# EAGLE board DigitalSandbox_Panel_v11a (EAGLE 7.3.0), part 1 of 2
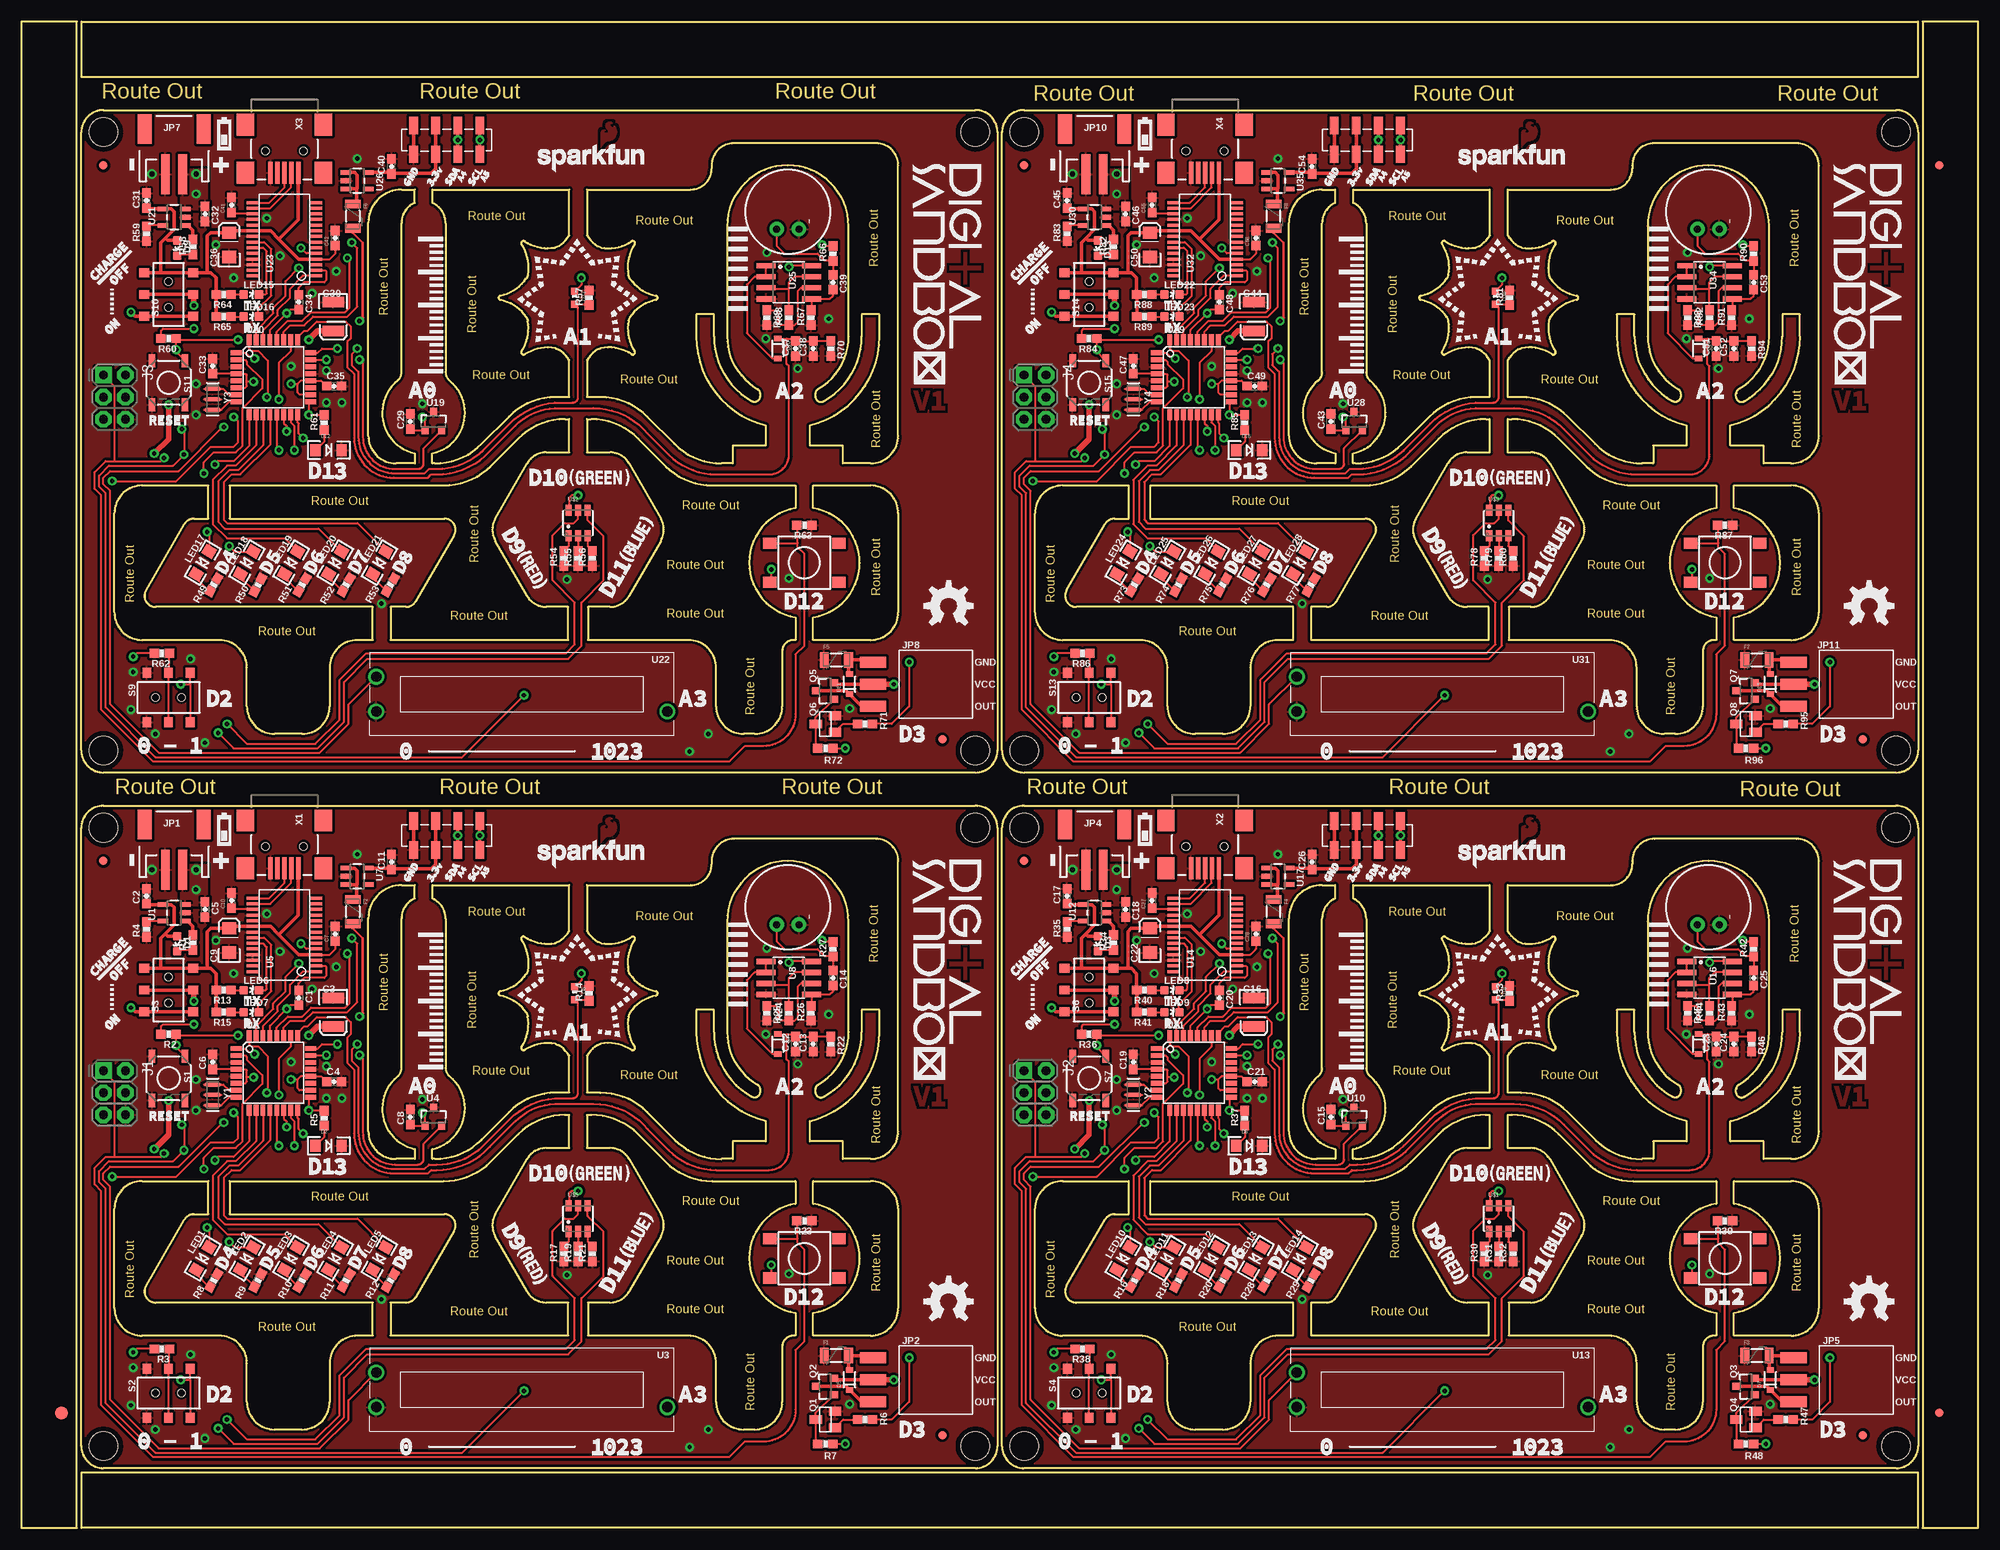
[diagram p0: board, top side]
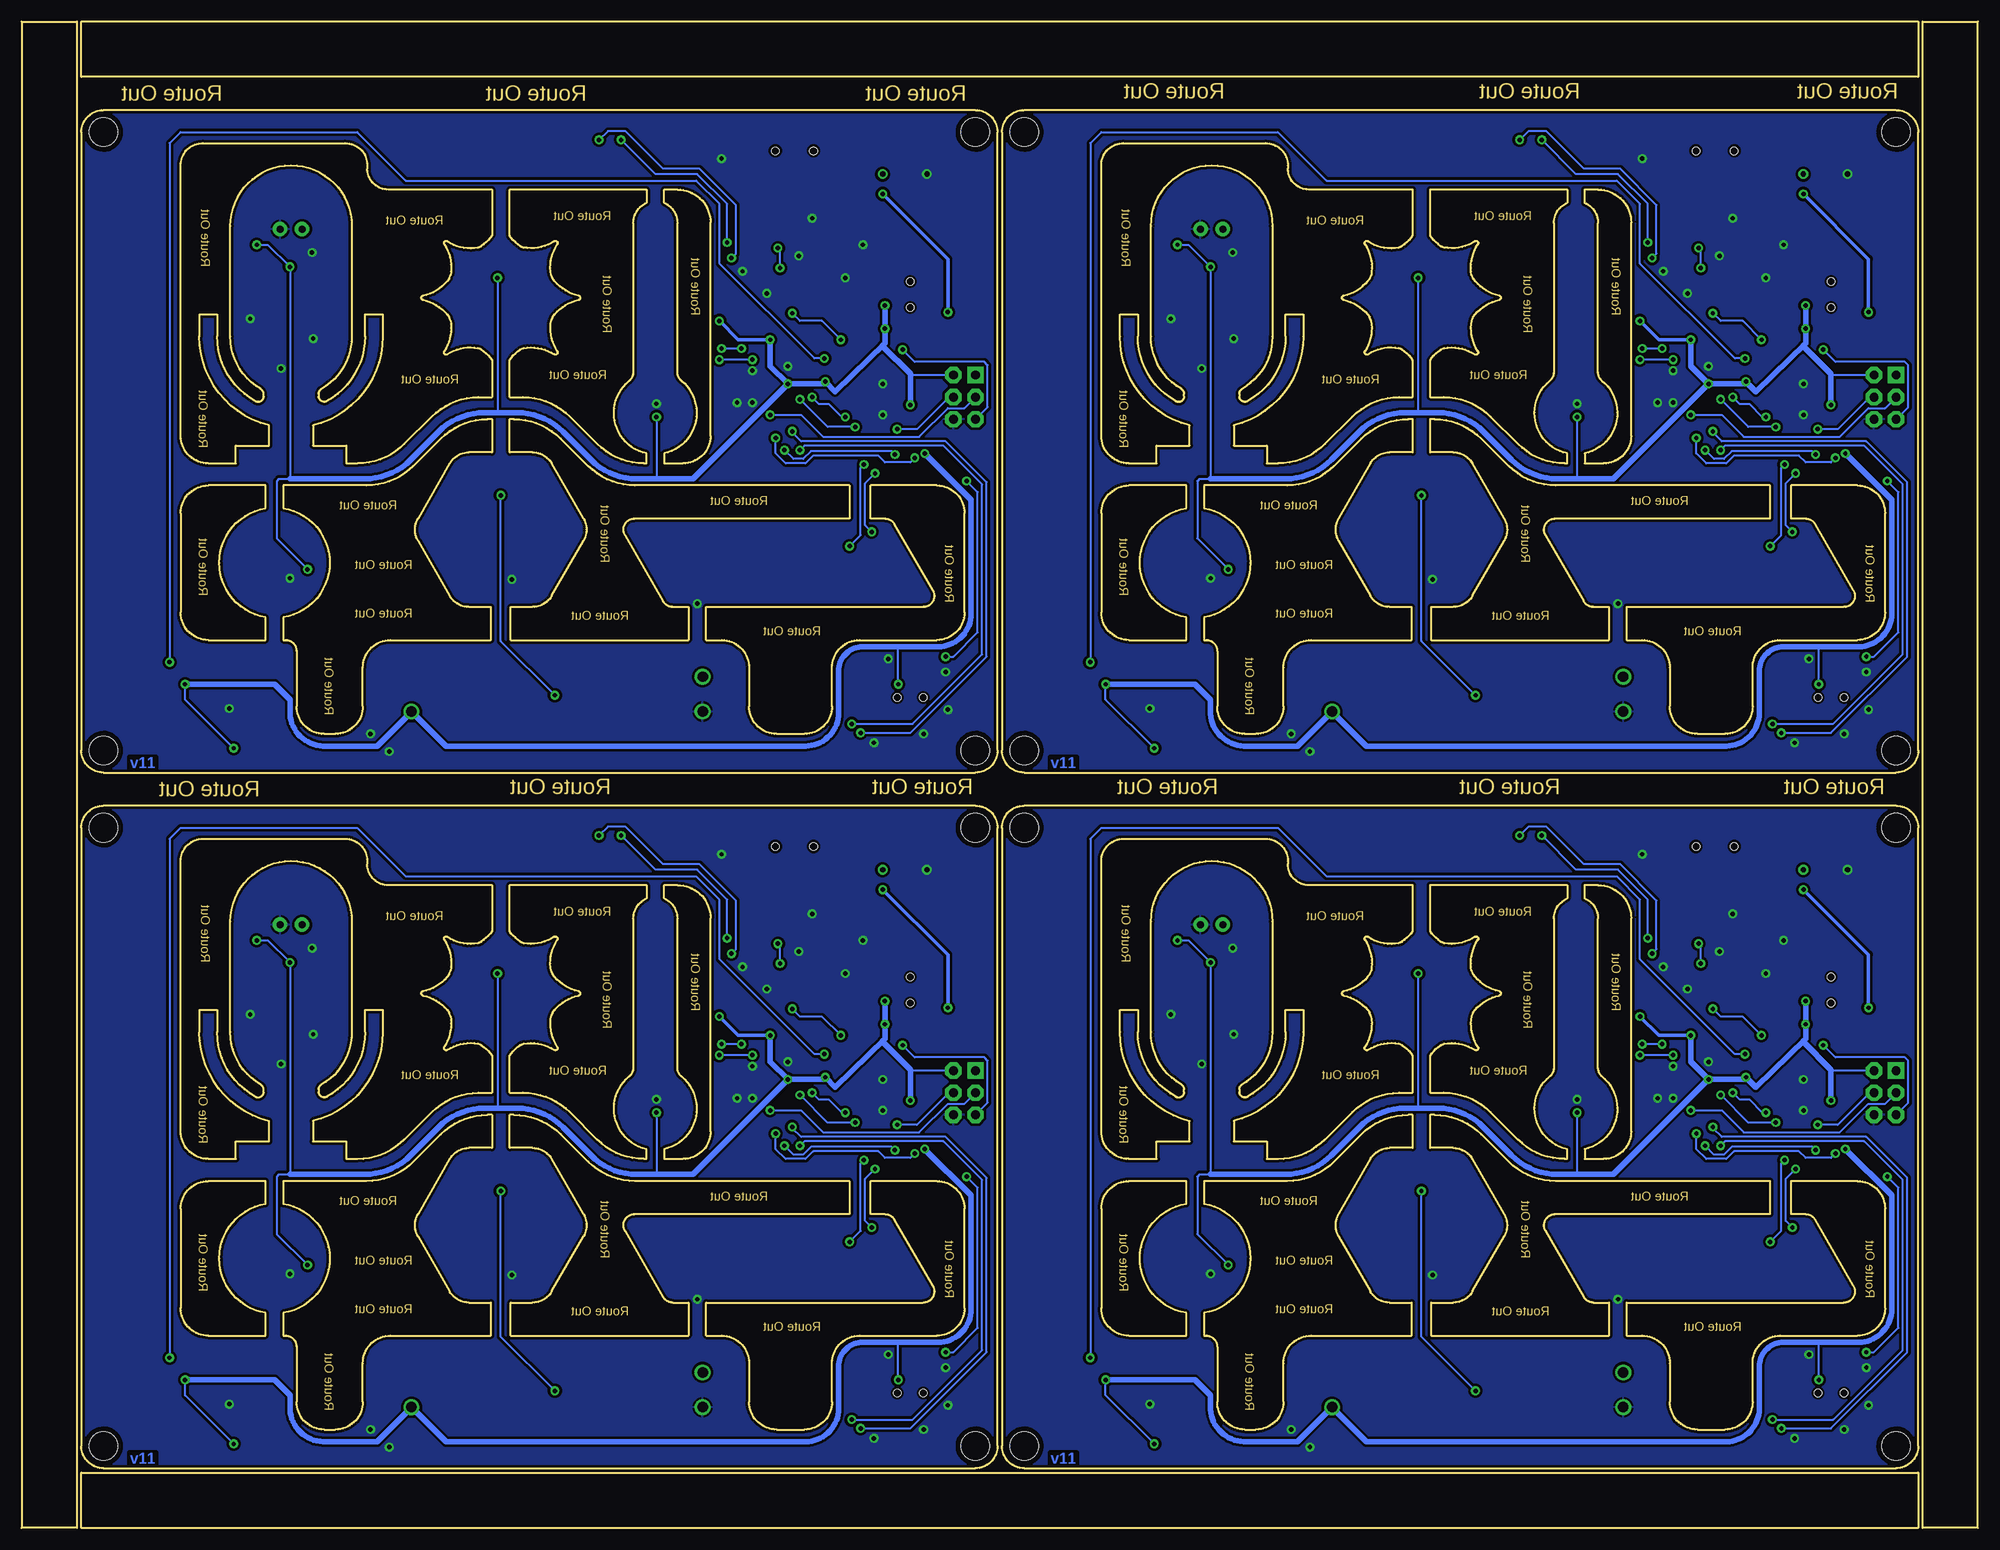
[diagram p1: board, bottom side, seen from below]

Size 225.04 x 173.23 mm. Coordinates in mm from the lower left corner, seen from the top.
Outline: 744 segments
Copper layers (1*16): Top 0.035mm / dielectric 1.5mm / Bottom 0.035mm
Design rules "SparkFun-2-layer": minimum track width 7mil, minimum drill 15mil, track to track 8mil, track to pad 8mil, pad to pad 8mil, via to via 8mil, smd to smd 8mil, copper to edge 8mil, drill to drill 8mil, minimum pad ring 12mil, minimum via ring 10mil, stop-mask expansion 4mil, vias tented up to drill 20mil, thermal gap 10mil
Net classes: 0 default: width 0.203 mm; 1 power: width 0.254 mm

## Footprints (pad centres in the part's own frame; a part is rotated, then mirrored left to right if it is on the bottom)
0603-CAP = smd 1.1 x 1: 1 -0.85,0; 2 0.85,0
EIA3528 = smd 1.2 x 2.5: A 1.65,0; C -1.65,0
EIA3216 = smd 1.4 x 1.6: A 1.4,0; C -1.4,0
LED-0603 = smd 1 x 1: A 0,-0.877; C 0,0.877
LED-1206 = smd 1.2 x 1.4: A -1.5,0; C 1.5,0
SOD-323 = smd 0.63 x 0.83: A 1.15,0; C -1.15,0
FIDUCIAL-1.5X3 = smd 1.5 x 1.5: 1 0,0
FIDUCIAL-1X2 = smd 1 x 1: 1 0,0
PTC-1206 = smd 1 x 1.8: 1 -1.4,0; 2 1.4,0
2X3-NS = drill 1.016 pad 1.88 square: 1 -2.54,-1.27 | drill 1.016 pad 1.88 octagon: 2 -2.54,1.27; 3 0,-1.27; 4 0,1.27; 5 2.54,-1.27; 6 2.54,1.27
JST-2-SMD = smd 1 x 4.6: 1 -1,-3.7; 2 1,-3.7 | smd 1.6 x 3.4: NC1 -3.4,1.5; NC2 3.4,1.5
1X03_SMD_RA_FEMALE = smd 1.25 x 3: 1 -2.54,7.225; 2 0,7.225; 3 2.54,7.225
1X04_SMD_STRAIGHT_COMBO = smd 1 x 2: 1 0,-1.65; 1-2 0,1.65; 2 2.54,1.65; 2-2 2.54,-1.65; 3 5.08,-1.65; 3-2 5.08,1.65; 4 7.62,1.65; 4-2 7.62,-1.65
SOT23 = smd 1 x 1.4: 1 -0.95,-1.1; 2 0.95,-1.1; 3 0,1.1
SOT23-3 = smd 0.8 x 0.9: 1 -0.95,-1; 2 0.95,-1; 3 0,1.1
0603-RES = smd 1.1 x 1: 1 -0.85,0; 2 0.85,0
TACTILE_SWITCH_SMD = smd 1.524 x 0.762: 1 -2.54,1.905; 2 2.54,1.905; 3 -2.54,-1.905; 4 2.54,-1.905
AYZ0202 = smd 1 x 1.15: 1 -2.5,2.825; 2 0,2.825; 3 2.5,2.825; 4 -2.5,-2.825; 5 0,-2.825; 6 2.5,-2.825 | hole 0.85: 1.5,0; -1.5,0
TACTILE_SWITCH_TALL = smd 1.55 x 1.3: A1 -3.975,-2.25; A2 3.975,-2.25; B1 -3.975,2.25; B2 3.975,2.25
STAND-OFF = hole 3.302: 0,0
SOT23-5 = smd 0.55 x 1.2: 1 -0.95,-1.3; 2 0,-1.3; 3 0.95,-1.3; 4 0.95,1.3; 5 -0.95,1.3
TQFP32-08 = smd 1.27 x 0.559: 1 -4.293,2.8; 2 -4.293,2; 3 -4.293,1.2; 4 -4.293,0.4; 5 -4.293,-0.4; 6 -4.293,-1.2; 7 -4.293,-2; 8 -4.293,-2.8; 17 4.293,-2.8; 18 4.293,-2; 19 4.293,-1.2; 20 4.293,-0.4; 21 4.293,0.4; 22 4.293,1.2; 23 4.293,2; 24 4.293,2.8 | smd 0.559 x 1.27: 9 -2.8,-4.293; 10 -2,-4.293; 11 -1.2,-4.293; 12 -0.4,-4.293; 13 0.4,-4.293; 14 1.2,-4.293; 15 2,-4.293; 16 2.8,-4.293; 25 2.8,4.293; 26 2,4.293; 27 1.2,4.293; 28 0.4,4.293; 29 -0.4,4.293; 30 -1.2,4.293; 31 -2,4.293; 32 -2.8,4.293
C2031N-1A2-B10K-GP = drill 1.2: 1 -16.75,2; 2 -16.75,-2; 3 16.75,-2
SSOP28DB = smd 0.348 x 1.397: 1 -4.225,-3.656; 2 -3.575,-3.656; 3 -2.925,-3.656; 4 -2.275,-3.656; 5 -1.625,-3.656; 6 -0.975,-3.656; 7 -0.325,-3.656; 8 0.325,-3.656; 9 0.975,-3.656; 10 1.625,-3.656; 11 2.275,-3.656; 12 2.925,-3.656; 13 3.575,-3.656; 14 4.225,-3.656; 15 4.225,3.656; 16 3.575,3.656; 17 2.925,3.656; 18 2.275,3.656; 19 1.625,3.656; 20 0.975,3.656; 21 0.325,3.656; 22 -0.325,3.656; 23 -0.975,3.656; 24 -1.625,3.656; 25 -2.275,3.656; 26 -2.925,3.656; 27 -3.575,3.656; 28 -4.225,3.656
ALS-PT19 = smd 0.8 x 0.8: C -0.75,0; E 0.75,0
SO08 = smd 0.61 x 2.21: 1 -1.905,-2.616; 2 -0.635,-2.616; 3 0.635,-2.616; 4 1.905,-2.616; 5 1.905,2.616; 6 0.635,2.616; 7 -0.635,2.616; 8 -1.905,2.616
MIC-9.7MM = drill 0.8 pad 1.676: 1 -2,1.27; 2 -2,-1.27
PLCC-6-LED = smd 0.7 x 1.3: AB -1.1,1.475; AG 1.1,1.475; AR 0,1.475; CB -1.1,-1.475; CG 1.1,-1.475; CR 0,-1.475
USB-MINIB = smd 2.5 x 0.5: D+ 2.5,0; D- 2.5,0.8; GND 2.5,-1.6; ID 2.5,-0.8; VBUS 2.5,1.6 | smd 2.5 x 2: MTN1 -3,4.5; MTN2 2.5,4.5; MTN3 -3,-4.5; MTN4 2.5,-4.5 | hole 0.9: 0,2.2; 0,-2.2
RESONATOR-SMD = smd 0.45 x 1.905: 1 -1.2,0; 2 0,0; 3 1.2,0

## Placement (x,y rotation side)
C1  0.1uF  [0603-CAP]  31.88,60.96 270 top
C2  4.7uF  [0603-CAP]  14.35,72.64 90 top
C3  47uF  [EIA3528]  35.85,59.31 270 top
C4  1.0uF  [0603-CAP]  35.94,51.31 0 top
C5  4.7uF  [0603-CAP]  21.08,71.12 270 top
C6  0.1uF  [0603-CAP]  21.97,53.59 90 top
C7  0.1uF  [0603-CAP]  36.07,68.33 90 top
C8  0.1uF  [0603-CAP]  44.7,47.24 90 top
C9  10uF  [EIA3216]  23.88,67.56 90 top
C10  0.1uF  [0603-CAP]  24.13,72.14 90 top
C11  0.1uF  [0603-CAP]  42.55,76.58 90 top
C12  0.1uF  [0603-CAP]  89.03,55.63 90 top
C13  0.1uF  [0603-CAP]  91.06,55.63 90 top
C14  0.1uF  [0603-CAP]  93.34,63.25 270 top
C15  0.1uF  [0603-CAP]  150.62,47.24 90 top
C16  47uF  [EIA3528]  141.76,59.31 270 top
C17  4.7uF  [0603-CAP]  120.27,72.64 90 top
C18  4.7uF  [0603-CAP]  127,71.12 270 top
C19  0.1uF  [0603-CAP]  127.89,53.59 90 top
C20  0.1uF  [0603-CAP]  137.79,60.96 270 top
C21  1.0uF  [0603-CAP]  141.86,51.31 0 top
C22  10uF  [EIA3216]  129.79,67.56 90 top
C23  0.1uF  [0603-CAP]  194.94,55.63 90 top
C24  0.1uF  [0603-CAP]  196.98,55.63 90 top
C25  0.1uF  [0603-CAP]  199.26,63.25 270 top
C26  0.1uF  [0603-CAP]  148.46,76.58 90 top
C27  0.1uF  [0603-CAP]  130.05,72.14 90 top
C28  0.1uF  [0603-CAP]  141.99,68.33 90 top
C29  0.1uF  [0603-CAP]  44.7,127.25 90 top
C30  47uF  [EIA3528]  35.85,139.32 270 top
C31  4.7uF  [0603-CAP]  14.35,152.65 90 top
C32  4.7uF  [0603-CAP]  21.08,151.13 270 top
C33  0.1uF  [0603-CAP]  21.97,133.6 90 top
C34  0.1uF  [0603-CAP]  31.88,140.97 270 top
C35  1.0uF  [0603-CAP]  35.94,131.32 0 top
C36  10uF  [EIA3216]  23.88,147.57 90 top
C37  0.1uF  [0603-CAP]  89.03,135.64 90 top
C38  0.1uF  [0603-CAP]  91.06,135.64 90 top
C39  0.1uF  [0603-CAP]  93.34,143.26 270 top
C40  0.1uF  [0603-CAP]  42.55,156.59 90 top
C41  0.1uF  [0603-CAP]  24.13,152.15 90 top
C42  0.1uF  [0603-CAP]  36.07,148.34 90 top
C43  0.1uF  [0603-CAP]  150.62,127.25 90 top
C44  47uF  [EIA3528]  141.76,139.32 270 top
C45  4.7uF  [0603-CAP]  120.27,152.65 90 top
C46  4.7uF  [0603-CAP]  127,151.13 270 top
C47  0.1uF  [0603-CAP]  127.89,133.6 90 top
C48  0.1uF  [0603-CAP]  137.79,140.97 270 top
C49  1.0uF  [0603-CAP]  141.86,131.32 0 top
C50  10uF  [EIA3216]  129.79,147.57 90 top
C51  0.1uF  [0603-CAP]  194.94,135.64 90 top
C52  0.1uF  [0603-CAP]  196.98,135.64 90 top
C53  0.1uF  [0603-CAP]  199.26,143.26 270 top
C54  0.1uF  [0603-CAP]  148.46,156.59 90 top
C55  0.1uF  [0603-CAP]  130.05,152.15 90 top
C56  0.1uF  [0603-CAP]  141.99,148.34 90 top
D1  Yellow  [LED-0603]  17.91,67.18 180 top
D2  RED  [LED-1206]  35.31,43.94 0 top
D3  Yellow  [LED-0603]  123.83,67.18 180 top
D4  [SOD-323]  87,55.63 270 top
D5  [SOD-323]  95.25,17.02 90 top
D6  [SOD-323]  192.91,55.63 270 top
D7  [SOD-323]  201.17,17.02 90 top
D8  RED  [LED-1206]  141.22,43.94 0 top
D9  Yellow  [LED-0603]  17.91,147.19 180 top
D10  [SOD-323]  87,135.64 270 top
D11  [SOD-323]  95.25,97.03 90 top
D12  RED  [LED-1206]  35.31,123.95 0 top
D13  Yellow  [LED-0603]  123.83,147.19 180 top
D14  [SOD-323]  192.91,135.64 270 top
D15  [SOD-323]  201.17,97.03 90 top
D16  RED  [LED-1206]  141.22,123.95 0 top
E$1  [FIDUCIAL-1.5X3]  4.57,13.21 0 top
E$4  [FIDUCIAL-1X2]  220.6,13.21 0 top
E$5  [FIDUCIAL-1X2]  220.6,156.72 180 top
F1  PTCSMD  [PTC-1206]  93.73,19.81 0 top
F2  PTCSMD  [PTC-1206]  38.1,70.87 270 top
F3  PTCSMD  [PTC-1206]  199.64,19.81 0 top
F4  PTCSMD  [PTC-1206]  144.02,70.87 270 top
F5  PTCSMD  [PTC-1206]  93.73,99.82 0 top
F6  PTCSMD  [PTC-1206]  38.1,150.88 270 top
F7  PTCSMD  [PTC-1206]  199.64,99.82 0 top
F8  PTCSMD  [PTC-1206]  144.02,150.88 270 top
FID1  FIDUCIAL1X2  [FIDUCIAL-1X2]  105.92,10.67 0 top
FID2  FIDUCIAL1X2  [FIDUCIAL-1X2]  9.4,76.71 0 top
FID3  FIDUCIAL1X2  [FIDUCIAL-1X2]  211.84,10.67 0 top
FID4  FIDUCIAL1X2  [FIDUCIAL-1X2]  115.32,76.71 0 top
FID5  FIDUCIAL1X2  [FIDUCIAL-1X2]  105.92,90.68 0 top
FID6  FIDUCIAL1X2  [FIDUCIAL-1X2]  9.4,156.72 0 top
FID7  FIDUCIAL1X2  [FIDUCIAL-1X2]  211.84,90.68 0 top
FID8  FIDUCIAL1X2  [FIDUCIAL-1X2]  115.32,156.72 0 top
J1  AVR_SPI_PRG_6NS  [2X3-NS]  10.67,50.04 270 top
J2  AVR_SPI_PRG_6NS  [2X3-NS]  116.59,50.04 270 top
J3  AVR_SPI_PRG_6NS  [2X3-NS]  10.67,130.05 270 top
J4  AVR_SPI_PRG_6NS  [2X3-NS]  116.59,130.05 270 top
JP1  LiPo  [JST-2-SMD]  17.53,79.38 0 top
JP2  [1X03_SMD_RA_FEMALE]  105.16,17.02 90 top
JP3  [1X04_SMD_STRAIGHT_COMBO]  45.09,79.63 0 top
JP4  LiPo  [JST-2-SMD]  123.44,79.38 0 top
JP5  [1X03_SMD_RA_FEMALE]  211.07,17.02 90 top
JP6  [1X04_SMD_STRAIGHT_COMBO]  151,79.63 0 top
JP7  LiPo  [JST-2-SMD]  17.53,159.38 0 top
JP8  [1X03_SMD_RA_FEMALE]  105.16,97.03 90 top
JP9  [1X04_SMD_STRAIGHT_COMBO]  45.09,159.64 0 top
JP10  LiPo  [JST-2-SMD]  123.44,159.38 0 top
JP11  [1X03_SMD_RA_FEMALE]  211.07,97.03 90 top
JP12  [1X04_SMD_STRAIGHT_COMBO]  151,159.64 0 top
LED1  White  [LED-1206]  20.83,30.99 240 top
LED2  White  [LED-1206]  25.91,30.99 240 top
LED3  White  [LED-1206]  30.99,30.99 240 top
LED4  White  [LED-1206]  36.07,30.99 240 top
LED5  White  [LED-1206]  41.15,30.99 240 top
LED6  Red  [LED-0603]  26.42,61.85 270 top
LED7  Green  [LED-0603]  26.42,59.31 270 top
LED8  Red  [LED-0603]  132.33,61.85 270 top
LED9  Green  [LED-0603]  132.33,59.31 270 top
LED10  White  [LED-1206]  126.75,30.99 240 top
LED11  White  [LED-1206]  131.83,30.99 240 top
LED12  White  [LED-1206]  136.91,30.99 240 top
LED13  White  [LED-1206]  141.99,30.99 240 top
LED14  White  [LED-1206]  147.07,30.99 240 top
LED15  Red  [LED-0603]  26.42,141.86 270 top
LED16  Green  [LED-0603]  26.42,139.32 270 top
LED17  White  [LED-1206]  20.83,111 240 top
LED18  White  [LED-1206]  25.91,111 240 top
LED19  White  [LED-1206]  30.99,111 240 top
LED20  White  [LED-1206]  36.07,111 240 top
LED21  White  [LED-1206]  41.15,111 240 top
LED22  Red  [LED-0603]  132.33,141.86 270 top
LED23  Green  [LED-0603]  132.33,139.32 270 top
LED24  White  [LED-1206]  126.75,111 240 top
LED25  White  [LED-1206]  131.83,111 240 top
LED26  White  [LED-1206]  136.91,111 240 top
LED27  White  [LED-1206]  141.99,111 240 top
LED28  White  [LED-1206]  147.07,111 240 top
Q1  MOSFET-N  [SOT23]  92.46,12.45 90 top
Q2  MOSFET-P  [SOT23-3]  92.46,16.26 90 top
Q3  MOSFET-P  [SOT23-3]  198.37,16.26 90 top
Q4  MOSFET-N  [SOT23]  198.37,12.45 90 top
Q5  MOSFET-P  [SOT23-3]  92.46,96.27 90 top
Q6  MOSFET-N  [SOT23]  92.46,92.46 90 top
Q7  MOSFET-P  [SOT23-3]  198.37,96.27 90 top
Q8  MOSFET-N  [SOT23]  198.37,92.46 90 top
R1  330  [0603-RES]  19.68,67.31 90 top
R2  10k  [0603-RES]  16.89,56.77 180 top
R3  10k  [0603-RES]  16.13,20.57 180 top
R4  10k  [0603-RES]  14.35,68.83 90 top
R5  330  [0603-RES]  34.8,47.12 90 top
R6  1k  [0603-RES]  97.03,12.45 0 top
R7  1k  [0603-RES]  92.46,9.65 180 top
R8  300  [0603-RES]  22.1,28.45 60 top
R9  300  [0603-RES]  27.18,28.45 62 top
R10  300  [0603-RES]  32.26,28.45 60 top
R11  300  [0603-RES]  37.34,28.45 60 top
R12  300  [0603-RES]  42.42,28.45 60 top
R13  1k  [0603-RES]  23.24,61.85 180 top
R14  10k  [0603-RES]  65.28,61.47 90 top
R15  1k  [0603-RES]  23.24,59.31 180 top
R16  300  [0603-RES]  128.02,28.45 60 top
R17  300  [0603-RES]  62.36,31.5 90 top
R18  300  [0603-RES]  133.1,28.45 62 top
R19  100  [0603-RES]  64.01,31.5 90 top
R20  300  [0603-RES]  138.18,28.45 60 top
R21  100  [0603-RES]  65.66,31.5 90 top
R22  100k  [0603-RES]  93.09,55.63 270 top
R23  10k  [0603-RES]  90.04,35.31 180 top
R24  10k  [0603-RES]  88.27,59.18 90 top
R25  2.2k  [0603-RES]  85.72,59.18 270 top
R26  10k  [0603-RES]  90.81,59.18 90 top
R27  10k  [0603-RES]  93.34,66.55 90 top
R28  300  [0603-RES]  143.26,28.45 60 top
R29  300  [0603-RES]  148.34,28.45 60 top
R30  300  [0603-RES]  168.28,31.5 90 top
R31  100  [0603-RES]  169.93,31.5 90 top
R32  100  [0603-RES]  171.58,31.5 90 top
R33  10k  [0603-RES]  171.2,61.47 90 top
R34  330  [0603-RES]  125.6,67.31 90 top
R35  10k  [0603-RES]  120.27,68.83 90 top
R36  10k  [0603-RES]  122.81,56.77 180 top
R37  330  [0603-RES]  140.72,47.12 90 top
R38  10k  [0603-RES]  122.05,20.57 180 top
R39  10k  [0603-RES]  195.96,35.31 180 top
R40  1k  [0603-RES]  129.16,61.85 180 top
R41  1k  [0603-RES]  129.16,59.31 180 top
R42  10k  [0603-RES]  199.26,66.55 90 top
R43  10k  [0603-RES]  196.72,59.18 90 top
R44  10k  [0603-RES]  194.18,59.18 90 top
R45  2.2k  [0603-RES]  191.64,59.18 270 top
R46  100k  [0603-RES]  199.01,55.63 270 top
R47  1k  [0603-RES]  202.95,12.45 0 top
R48  1k  [0603-RES]  198.37,9.65 180 top
R49  300  [0603-RES]  22.1,108.46 60 top
R50  300  [0603-RES]  27.18,108.46 62 top
R51  300  [0603-RES]  32.26,108.46 60 top
R52  300  [0603-RES]  37.34,108.46 60 top
R53  300  [0603-RES]  42.42,108.46 60 top
R54  300  [0603-RES]  62.36,111.51 90 top
R55  100  [0603-RES]  64.01,111.51 90 top
R56  100  [0603-RES]  65.66,111.51 90 top
R57  10k  [0603-RES]  65.28,141.48 90 top
R58  330  [0603-RES]  19.68,147.32 90 top
R59  10k  [0603-RES]  14.35,148.84 90 top
R60  10k  [0603-RES]  16.89,136.78 180 top
R61  330  [0603-RES]  34.8,127.13 90 top
R62  10k  [0603-RES]  16.13,100.58 180 top
R63  10k  [0603-RES]  90.04,115.32 180 top
R64  1k  [0603-RES]  23.24,141.86 180 top
R65  1k  [0603-RES]  23.24,139.32 180 top
R66  10k  [0603-RES]  93.34,146.56 90 top
R67  10k  [0603-RES]  90.81,139.19 90 top
R68  10k  [0603-RES]  88.27,139.19 90 top
R69  2.2k  [0603-RES]  85.72,139.19 270 top
R70  100k  [0603-RES]  93.09,135.64 270 top
R71  1k  [0603-RES]  97.03,92.46 0 top
R72  1k  [0603-RES]  92.46,89.66 180 top
R73  300  [0603-RES]  128.02,108.46 60 top
R74  300  [0603-RES]  133.1,108.46 62 top
R75  300  [0603-RES]  138.18,108.46 60 top
R76  300  [0603-RES]  143.26,108.46 60 top
R77  300  [0603-RES]  148.34,108.46 60 top
R78  300  [0603-RES]  168.28,111.51 90 top
R79  100  [0603-RES]  169.93,111.51 90 top
R80  100  [0603-RES]  171.58,111.51 90 top
R81  10k  [0603-RES]  171.2,141.48 90 top
R82  330  [0603-RES]  125.6,147.32 90 top
R83  10k  [0603-RES]  120.27,148.84 90 top
R84  10k  [0603-RES]  122.81,136.78 180 top
R85  330  [0603-RES]  140.72,127.13 90 top
R86  10k  [0603-RES]  122.05,100.58 180 top
R87  10k  [0603-RES]  195.96,115.32 180 top
R88  1k  [0603-RES]  129.16,141.86 180 top
R89  1k  [0603-RES]  129.16,139.32 180 top
R90  10k  [0603-RES]  199.26,146.56 90 top
R91  10k  [0603-RES]  196.72,139.19 90 top
R92  10k  [0603-RES]  194.18,139.19 90 top
R93  2.2k  [0603-RES]  191.64,139.19 270 top
R94  100k  [0603-RES]  199.01,135.64 270 top
R95  1k  [0603-RES]  202.95,92.46 0 top
R96  1k  [0603-RES]  198.37,89.66 180 top
S1  Reset  [TACTILE_SWITCH_SMD]  16.89,51.69 270 top
S2  [AYZ0202]  16.89,15.49 0 top
S3  On/Off  [AYZ0202]  16.89,61.85 90 top
S4  [AYZ0202]  122.81,15.49 0 top
S5  SWITCH-MOMENTARY-2SMD-4  [TACTILE_SWITCH_TALL]  90.04,30.99 180 top
S6  On/Off  [AYZ0202]  122.81,61.85 90 top
S7  Reset  [TACTILE_SWITCH_SMD]  122.81,51.69 270 top
S8  SWITCH-MOMENTARY-2SMD-4  [TACTILE_SWITCH_TALL]  195.96,30.99 180 top
S9  [AYZ0202]  16.89,95.5 0 top
S10  On/Off  [AYZ0202]  16.89,141.86 90 top
S11  Reset  [TACTILE_SWITCH_SMD]  16.89,131.7 270 top
S12  SWITCH-MOMENTARY-2SMD-4  [TACTILE_SWITCH_TALL]  90.04,111 180 top
S13  [AYZ0202]  122.81,95.5 0 top
S14  On/Off  [AYZ0202]  122.81,141.86 90 top
S15  Reset  [TACTILE_SWITCH_SMD]  122.81,131.7 270 top
S16  SWITCH-MOMENTARY-2SMD-4  [TACTILE_SWITCH_TALL]  195.96,111 180 top
STANDOFF1  STAND-OFF  [STAND-OFF]  109.73,80.52 0 top
STANDOFF2  STAND-OFF  [STAND-OFF]  109.73,9.4 0 top
STANDOFF3  STAND-OFF  [STAND-OFF]  9.4,9.4 0 top
STANDOFF4  STAND-OFF  [STAND-OFF]  9.4,80.52 0 top
STANDOFF5  STAND-OFF  [STAND-OFF]  115.32,80.52 0 top
STANDOFF6  STAND-OFF  [STAND-OFF]  115.32,9.4 0 top
STANDOFF7  STAND-OFF  [STAND-OFF]  215.65,9.4 0 top
STANDOFF8  STAND-OFF  [STAND-OFF]  215.65,80.52 0 top
STANDOFF9  STAND-OFF  [STAND-OFF]  9.4,160.53 0 top
STANDOFF10  STAND-OFF  [STAND-OFF]  9.4,89.41 0 top
STANDOFF11  STAND-OFF  [STAND-OFF]  109.73,89.41 0 top
STANDOFF12  STAND-OFF  [STAND-OFF]  109.73,160.53 0 top
STANDOFF13  STAND-OFF  [STAND-OFF]  115.32,160.53 0 top
STANDOFF14  STAND-OFF  [STAND-OFF]  115.32,89.41 0 top
STANDOFF15  STAND-OFF  [STAND-OFF]  215.65,89.41 0 top
STANDOFF16  STAND-OFF  [STAND-OFF]  215.65,160.53 0 top
U1  MCP73831  [SOT23-5]  17.53,70.74 90 top
U2  ATMEGA328  [TQFP32-08]  28.96,52.32 0 top
U3  10K_LINEAR_SLIDE_POT_SMALL  [C2031N-1A2-B10K-GP]  57.53,15.88 0 top
U4  MCP9700  [SOT23-3]  47.37,47.24 0 top
U5  FT232RLSSOP  [SSOP28DB]  30.23,68.2 90 top
U6  LIGHTSENSORALS  [ALS-PT19]  63.63,61.47 270 top
U7  V_REG_MIC52053.3V  [SOT23-5]  38.61,74.93 270 top
U8  LMV358SOIC  [SO08]  88.27,63.25 270 top
U9  MIC9.7MM  [MIC-9.7MM]  88.14,71.37 90 top
U10  MCP9700  [SOT23-3]  153.29,47.24 0 top
U11  ATMEGA328  [TQFP32-08]  134.87,52.32 0 top
U12  MCP73831  [SOT23-5]  123.44,70.74 90 top
U13  10K_LINEAR_SLIDE_POT_SMALL  [C2031N-1A2-B10K-GP]  163.45,15.88 0 top
U14  FT232RLSSOP  [SSOP28DB]  136.14,68.2 90 top
U15  MIC9.7MM  [MIC-9.7MM]  194.06,71.37 90 top
U16  LMV358SOIC  [SO08]  194.18,63.25 270 top
U17  V_REG_MIC52053.3V  [SOT23-5]  144.53,74.93 270 top
U18  LIGHTSENSORALS  [ALS-PT19]  169.54,61.47 270 top
U19  MCP9700  [SOT23-3]  47.37,127.25 0 top
U20  ATMEGA328  [TQFP32-08]  28.96,132.33 0 top
U21  MCP73831  [SOT23-5]  17.53,150.75 90 top
U22  10K_LINEAR_SLIDE_POT_SMALL  [C2031N-1A2-B10K-GP]  57.53,95.89 0 top
U23  FT232RLSSOP  [SSOP28DB]  30.23,148.21 90 top
U24  MIC9.7MM  [MIC-9.7MM]  88.14,151.38 90 top
U25  LMV358SOIC  [SO08]  88.27,143.26 270 top
U26  V_REG_MIC52053.3V  [SOT23-5]  38.61,154.94 270 top
U27  LIGHTSENSORALS  [ALS-PT19]  63.63,141.48 270 top
U28  MCP9700  [SOT23-3]  153.29,127.25 0 top
U29  ATMEGA328  [TQFP32-08]  134.87,132.33 0 top
U30  MCP73831  [SOT23-5]  123.44,150.75 90 top
U31  10K_LINEAR_SLIDE_POT_SMALL  [C2031N-1A2-B10K-GP]  163.45,95.89 0 top
U32  FT232RLSSOP  [SSOP28DB]  136.14,148.21 90 top
U33  MIC9.7MM  [MIC-9.7MM]  194.06,151.38 90 top
U34  LMV358SOIC  [SO08]  194.18,143.26 270 top
U35  V_REG_MIC52053.3V  [SOT23-5]  144.53,154.94 270 top
U36  LIGHTSENSORALS  [ALS-PT19]  169.54,141.48 270 top
U$1  LED-TRICOLOR  [PLCC-6-LED]  169.93,35.56 0 top
U$2  LED-TRICOLOR  [PLCC-6-LED]  64.01,115.57 0 top
U$3  LED-TRICOLOR  [PLCC-6-LED]  169.93,115.57 0 top
U$5  LED-TRICOLOR  [PLCC-6-LED]  64.01,35.56 0 top
X1  USBSMD  [USB-MINIB]  30.23,78.36 270 top
X2  USBSMD  [USB-MINIB]  136.14,78.36 270 top
X3  USBSMD  [USB-MINIB]  30.23,158.37 270 top
X4  USBSMD  [USB-MINIB]  136.14,158.37 270 top
Y1  8MHz  [RESONATOR-SMD]  21.97,49.78 270 top
Y2  8MHz  [RESONATOR-SMD]  127.89,49.78 270 top
Y3  8MHz  [RESONATOR-SMD]  21.97,129.79 270 top
Y4  8MHz  [RESONATOR-SMD]  127.89,129.79 270 top

## Library data of the parts
C1 C6-C8 C10-C15 C19 C20 C23-C29 C33 C34 C37-C43 C47 C48 C51-C56 = SparkFun-Capacitors; PROD_ID: CAP-00810
C2 C5 C17 C18 C31 C32 C45 C46 = SparkFun-Capacitors; PROD_ID: CAP-08280
C3 C16 C30 C44 = SparkFun-Capacitors; PROD_ID: CAP-08310
C4 C21 C35 C49 = SparkFun-Capacitors; PROD_ID: CAP-00868
C9 C22 C36 C50 = SparkFun-Capacitors; PROD_ID: CAP-00811
D1 D3 D9 D13 = SparkFun-LED; PROD_ID: DIO-09003
D2 D8 D12 D16 = SparkFun-LED; PROD_ID: DIO-00809
D4-D7 D10 D11 D14 D15 = SparkFun-DiscreteSemi; PROD_ID: DIO-09646
E$1 = SparkFun-Retired
E$4 E$5 FID1-FID8 = SparkFun-Aesthetics
F1-F8 = SparkFun-PowerIC; PROD_ID: RES-11150
J1-J4 JP3 JP6 JP9 JP12 = SparkFun-Connectors
JP1 JP4 JP7 JP10 = SparkFun-Connectors; PROD_ID: CONN-08352
JP2 JP5 JP8 JP11 = SparkFun-Connectors; PROD_ID: CONN-10926; VALUE: 1x3 RA Female .1"
LED1-LED5 LED10-LED14 LED17-LED21 LED24-LED28 = SparkFun-LED; PROD_ID: DIO-09955; VALUE: WHITE
LED6 LED8 LED15 LED22 = SparkFun-LED; PROD_ID: DIO-00819; VALUE: RED
LED7 LED9 LED16 LED23 = SparkFun-LED; PROD_ID: DIO-00821; VALUE: GREEN
Q1 Q4 Q6 Q8 = SparkFun-DiscreteSemi; PROD_ID: TRANS-00830
Q2 Q3 Q5 Q7 = SparkFun-DiscreteSemi; PROD_ID: TRANS-08285
R1 R5 R34 R37 R58 R61 R82 R85 = SparkFun-Resistors; PROD_ID: RES-00818
R2-R4 R14 R23 R24 R26 R27 R33 R35 R36 R38 R39 R42-R44 R57 R59 R60 R62 R63 R66-R68 R81 R83 R84 R86 R87 R90-R92 = SparkFun-Resistors; PROD_ID: RES-00824; VALUE: 10K
R6 R7 R13 R15 R40 R41 R47 R48 R64 R65 R71 R72 R88 R89 R95 R96 = SparkFun-Resistors; PROD_ID: RES-07856; VALUE: 1K
R8-R12 R16-R18 R20 R28-R30 R49-R54 R73-R78 = SparkFun-Resistors; PROD_ID: RES_10328
R19 R21 R31 R32 R55 R56 R79 R80 = SparkFun-Resistors; PROD_ID: RES-07863
R22 R46 R70 R94 = SparkFun-Resistors; PROD_ID: RES-07828
R25 R45 R69 R93 = SparkFun-Resistors; PROD_ID: RES-08272
S1 S7 S11 S15 = SparkFun-Electromechanical; PROD_ID: SWCH-08247
S2-S4 S6 S9 S10 S13 S14 = SparkFun-Electromechanical; PROD_ID: SWCH-08179; VALUE: DPDT
S5 S8 S12 S16 = SparkFun-Electromechanical; PROD_ID: SWCH-11966
STANDOFF1-STANDOFF16 = SparkFun-Electromechanical
U1 U12 U21 U30 = SparkFun-PowerIC; PROD_ID: IC-09995
U2 U11 U20 U29 = SparkFun-DigitalIC; PROD_ID: IC-09069; VALUE: ATMEGA328P
U3 U13 U22 U31 = SparkFun-Resistors; PROD_ID: RES-11924
U4 U10 U19 U28 = SparkFun-Sensors; PROD_ID: IC-08917
U5 U14 U23 U32 = SparkFun-DigitalIC; PROD_ID: IC-00870
U6 U18 U27 U36 = SparkFun-Sensors; PROD_ID: IC-11836
U7 U17 U26 U35 = SparkFun-PowerIC; PROD_ID: VREG-00822; VALUE: 3.3V/150mA
U8 U16 U25 U34 = SparkFun-AnalogIC; PROD_ID: IC-09657
U9 U15 U24 U33 = SparkFun-Sensors; PROD_ID: COMP-08856
U$1-U$3 U$5 = SparkFun-LED; PROD_ID: DIO-12113
X1-X4 = SparkFun-Connectors; PROD_ID: CONN-08193
Y1-Y4 = SparkFun-FreqCtrl; PROD_ID: XTAL-08895; VALUE: 8MHZ

## Nets
3.3V [power]: C10.1 U5.17
3.3V1 [power]: C27.1 U14.17
3.3V2 [power]: C41.1 U23.17
3.3V3 [power]: C55.1 U32.17
5V: C2.1 C7.1 C9.A D1.A R13.2 R15.2 S3.3 S3.6 U1.4 U5.4 U5.20 X1.VBUS
5V1: C17.1 C22.A C28.1 D3.A R40.2 R41.2 S6.3 S6.6 U12.4 U14.4 U14.20 X2.VBUS
5V2: C31.1 C36.A C42.1 D9.A R64.2 R65.2 S10.3 S10.6 U21.4 U23.4 U23.20 X3.VBUS
5V3: C45.1 C50.A C56.1 D13.A R88.2 R89.2 S14.3 S14.6 U30.4 U32.4 U32.20 X4.VBUS
A0: U2.23 U4.2
A1: R14.1 U2.24 U6.E
A2: C12.2 C13.2 D4.C R22.1 U2.25
A3: U2.26 U3.1
A4: JP3.3 U2.27
A5: JP3.4 U2.28
A6: C23.2 C24.2 D6.C R46.1 U11.25
A7: U11.26 U13.1
A8: JP6.3 U11.27
A9: JP6.4 U11.28
A10: U10.2 U11.23
A11: R33.1 U11.24 U18.E
A12: C37.2 C38.2 D10.C R70.1 U20.25
A13: U20.26 U22.1
A14: JP9.3 U20.27
A15: JP9.4 U20.28
A16: U19.2 U20.23
A17: R57.1 U20.24 U27.E
A18: C51.2 C52.2 D14.C R94.1 U29.25
A19: U29.26 U31.1
A20: JP12.3 U29.27
A21: JP12.4 U29.28
A22: U28.2 U29.23
A23: R81.1 U29.24 U36.E
BLUE: R17.2 U$5.CB
BLUE1: R30.2 U$1.CB
BLUE2: R54.2 U$2.CB
BLUE3: R78.2 U$3.CB
CTS: U5.11
CTS1: U14.11
CTS2: U23.11
CTS3: U32.11
D1: J2.4 U11.15 U$1.AB
D2: R3.2 U2.32
D3: R6.2 U2.1
D4: LED1.A U2.2
D5: LED2.A U2.9
D6: LED3.A U2.10
D7: LED4.A U2.11
D8: LED5.A U2.12
D9: U2.13 U$5.AR
D10: U2.14 U$5.AG
D11: J1.4 U2.15 U$5.AB
D12: J1.1 R23.2 S5.A2 U2.16
D13: J1.3 R5.2 U2.17
D14: J2.3 R37.2 U11.17
D15: LED11.A U11.9
D16: U11.13 U$1.AR
D17: LED12.A U11.10
D18: U11.14 U$1.AG
D19: R38.2 U11.32
D20: R47.2 U11.1
D21: LED10.A U11.2
D22: LED14.A U11.12
D23: LED13.A U11.11
D24: J2.1 R39.2 S8.A2 U11.16
D25: J3.4 U20.15 U$2.AB
D26: J3.3 R61.2 U20.17
D27: LED18.A U20.9
D28: U20.13 U$2.AR
D29: LED19.A U20.10
D30: U20.14 U$2.AG
D31: R62.2 U20.32
D32: R71.2 U20.1
D33: LED17.A U20.2
D34: LED21.A U20.12
D35: LED20.A U20.11
D36: J3.1 R63.2 S12.A2 U20.16
D37: J4.4 U29.15 U$3.AB
D38: J4.3 R85.2 U29.17
D39: LED25.A U29.9
D40: U29.13 U$3.AR
D41: LED26.A U29.10
D42: U29.14 U$3.AG
D43: R86.2 U29.32
D44: R95.2 U29.1
D45: LED24.A U29.2
D46: LED28.A U29.12
D47: LED27.A U29.11
D48: J4.1 R87.2 S16.A2 U29.16
DTR: C1.1 U5.2
DTR1: C20.1 U14.2
DTR2: C34.1 U23.2
DTR3: C48.1 U32.2
GND [power]: C2.2 C3.C C4.2 C5.2 C6.2 C7.2 C8.2 C9.C C10.2 C11.2 C12.1 C13.1 D2.C F1.1 J1.6 JP1.1 JP3.1 Q1.2 R4.1 R8.2 R9.2 R10.2 R11.2 R12.2 R14.2 R17.1 R19.1 R21.1 R22.2 R23.1 R25.2 R26.1 S1.3 S1.4 S2.1 S2.4 U1.2 U2.3 U2.5 U2.21 U3.2 U4.3 U5.7 U5.18 U5.21 U5.25 U5.26 U7.2 U8.4 U9.2 X1.GND Y1.2
GND1 [power]: C15.2 C16.C C17.2 C18.2 C19.2 C21.2 C22.C C23.1 C24.1 C26.2 C27.2 C28.2 D8.C F3.1 J2.6 JP4.1 JP6.1 Q4.2 R16.2 R18.2 R20.2 R28.2 R29.2 R30.1 R31.1 R32.1 R33.2 R35.1 R39.1 R43.1 R45.2 R46.2 S4.1 S4.4 S7.3 S7.4 U10.3 U11.3 U11.5 U11.21 U12.2 U13.2 U14.7 U14.18 U14.21 U14.25 U14.26 U15.2 U16.4 U17.2 X2.GND Y2.2
GND2 [power]: C29.2 C30.C C31.2 C32.2 C33.2 C35.2 C36.C C37.1 C38.1 C40.2 C41.2 C42.2 D12.C F5.1 J3.6 JP7.1 JP9.1 Q6.2 R49.2 R50.2 R51.2 R52.2 R53.2 R54.1 R55.1 R56.1 R57.2 R59.1 R63.1 R67.1 R69.2 R70.2 S9.1 S9.4 S11.3 S11.4 U19.3 U20.3 U20.5 U20.21 U21.2 U22.2 U23.7 U23.18 U23.21 U23.25 U23.26 U24.2 U25.4 U26.2 X3.GND Y3.2
GND3 [power]: C43.2 C44.C C45.2 C46.2 C47.2 C49.2 C50.C C51.1 C52.1 C54.2 C55.2 C56.2 D16.C F7.1 J4.6 JP10.1 JP12.1 Q8.2 R73.2 R74.2 R75.2 R76.2 R77.2 R78.1 R79.1 R80.1 R81.2 R83.1 R87.1 R91.1 R93.2 R94.2 S13.1 S13.4 S15.3 S15.4 U28.3 U29.3 U29.5 U29.21 U30.2 U31.2 U32.7 U32.18 U32.21 U32.25 U32.26 U33.2 U34.4 U35.2 X4.GND Y4.2
GRN: R21.2 U$5.CG
GRN1: R32.2 U$1.CG
GRN2: R56.2 U$2.CG
GRN3: R80.2 U$3.CG
N$1: U2.7 Y1.1
N$2: D2.A R5.1
N$3: U2.8 Y1.3
N$4: Q1.3 Q2.1 R7.2
N$5: LED6.A R13.1
N$6: LED7.A R15.1
N$7 [power]: F2.1 U7.1 U7.3
N$8: D5.C JP2.1 Q2.3
N$9: LED3.C R10.1
N$10: Q1.1 R6.1
N$11: LED4.C R11.1
N$12: C11.1 JP3.2 U7.5
N$13: LED5.C R12.1
N$15: R3.1 S2.2 S2.5
N$16 [power]: D5.A F1.2 JP2.3
N$17: C14.1 R27.1 U9.1
N$18: LED1.C R8.1
N$20: C14.2 R26.2 U8.5
N$21: LED2.C R9.1
N$23: R24.1 R25.1 U8.6
N$24: D4.A U8.1 U8.2
N$25: LED10.C R16.1
N$26: R24.2 U8.3 U8.7
N$27: LED11.C R18.1
N$28: D8.A R37.1
N$29: U11.7 Y2.1
N$31: U11.8 Y2.3
N$32: D3.C R34.1
N$33: D1.C R1.1
N$34: LED12.C R20.1
N$35: LED13.C R28.1
N$36: LED14.C R29.1
N$37: R38.1 S4.2 S4.5
N$38: LED8.A R40.1
N$39: LED9.A R41.1
N$40: C25.1 R42.1 U15.1
N$41: C25.2 R43.2 U16.5
N$42: R44.1 R45.1 U16.6
N$43: D6.A U16.1 U16.2
N$44: R44.2 U16.3 U16.7
N$45: D7.C JP5.1 Q3.3
N$46: Q3.1 Q4.3 R48.2
N$47: Q4.1 R47.1
N$48: C26.1 JP6.2 U17.5
N$49 [power]: F4.1 U17.1 U17.3
N$50 [power]: D7.A F3.2 JP5.3
N$54: LED17.C R49.1
N$55: LED18.C R50.1
N$56: D12.A R61.1
N$57: U20.7 Y3.1
N$58: U20.8 Y3.3
N$59: D9.C R58.1
N$60: LED19.C R51.1
N$61: LED20.C R52.1
N$62: LED21.C R53.1
N$63: R62.1 S9.2 S9.5
N$64: LED15.A R64.1
N$65: LED16.A R65.1
N$66: C39.1 R66.1 U24.1
N$67: C39.2 R67.2 U25.5
N$68: R68.1 R69.1 U25.6
N$69: D10.A U25.1 U25.2
N$70: R68.2 U25.3 U25.7
N$71: D11.C JP8.1 Q5.3
N$72: Q5.1 Q6.3 R72.2
N$73: Q6.1 R71.1
N$74: C40.1 JP9.2 U26.5
N$75 [power]: F6.1 U26.1 U26.3
N$76 [power]: D11.A F5.2 JP8.3
N$80: LED24.C R73.1
N$81: LED25.C R74.1
N$82: D16.A R85.1
N$83: U29.7 Y4.1
N$84: U29.8 Y4.3
N$85: D13.C R82.1
N$86: LED26.C R75.1
N$87: LED27.C R76.1
N$88: LED28.C R77.1
N$89: R86.1 S13.2 S13.5
N$90: LED22.A R88.1
N$91: LED23.A R89.1
N$92: C53.1 R90.1 U33.1
N$93: C53.2 R91.2 U34.5
N$94: R92.1 R93.1 U34.6
N$95: D14.A U34.1 U34.2
N$96: R92.2 U34.3 U34.7
N$97: D15.C JP11.1 Q7.3
N$98: Q7.1 Q8.3 R96.2
N$99: Q8.1 R95.1
N$100: C54.1 JP12.2 U35.5
N$101 [power]: F8.1 U35.1 U35.3
N$102 [power]: D15.A F7.2 JP11.3
PROG: R4.2 U1.5
PROG1: R35.2 U12.5
PROG2: R59.2 U21.5
PROG3: R83.2 U30.5
RED: R19.2 U$5.CR
RED1: R31.2 U$1.CR
RED2: R55.2 U$2.CR
RED3: R79.2 U$3.CR
RST: C1.2 J1.5 R2.1 S1.1 U2.29
RST1: C20.2 J2.5 R36.1 S7.1 U11.29
RST2: C34.2 J3.5 R60.1 S11.1 U20.29
RST3: C48.2 J4.5 R84.1 S15.1 U29.29
RXD: U2.30 U5.1
RXD1: U11.30 U14.1
RXD2: U20.30 U23.1
RXD3: U29.30 U32.1
RXLED: LED7.C U5.22
RXLED1: LED9.C U14.22
RXLED2: LED16.C U23.22
RXLED3: LED23.C U32.22
STAT: R1.2 U1.1
STAT1: R34.2 U12.1
STAT2: R58.2 U21.1
STAT3: R82.2 U30.1
TXD: U2.31 U5.5
TXD1: U11.31 U14.5
TXD2: U20.31 U23.5
TXD3: U29.31 U32.5
TXLED: LED6.C U5.23
TXLED1: LED8.C U14.23
TXLED2: LED15.C U23.23
TXLED3: LED22.C U32.23
USB_D+: U5.15 X1.D+
USB_D+1: U14.15 X2.D+
USB_D+2: U23.15 X3.D+
USB_D+3: U32.15 X4.D+
USB_D-: U5.16 X1.D-
USB_D-1: U14.16 X2.D-
USB_D-2: U23.16 X3.D-
USB_D-3: U32.16 X4.D-
VBATT: C5.1 JP1.2 S3.1 S3.4 U1.3
VBATT1: C18.1 JP4.2 S6.1 S6.4 U12.3
VBATT2: C32.1 JP7.2 S10.1 S10.4 U21.3
VBATT3: C46.1 JP10.2 S14.1 S14.4 U30.3
VCC [power]: C3.A C4.1 C6.1 C8.1 F2.2 J1.2 JP2.2 Q2.2 R2.2 R7.1 R27.2 S2.3 S2.6 S3.2 S3.5 S5.B2 U2.4 U2.6 U2.18 U2.20 U3.3 U4.1 U6.C U8.8
VCC1 [power]: C15.1 C16.A C19.1 C21.1 F4.2 J2.2 JP5.2 Q3.2 R36.2 R42.2 R48.1 S4.3 S4.6 S6.2 S6.5 S8.B2 U10.1 U11.4 U11.6 U11.18 U11.20 U13.3 U16.8 U18.C
VCC2 [power]: C29.1 C30.A C33.1 C35.1 F6.2 J3.2 JP8.2 Q5.2 R60.2 R66.2 R72.1 S9.3 S9.6 S10.2 S10.5 S12.B2 U19.1 U20.4 U20.6 U20.18 U20.20 U22.3 U25.8 U27.C
VCC3 [power]: C43.1 C44.A C47.1 C49.1 F8.2 J4.2 JP11.2 Q7.2 R84.2 R90.2 R96.1 S13.3 S13.6 S14.2 S14.5 S16.B2 U28.1 U29.4 U29.6 U29.18 U29.20 U31.3 U34.8 U36.C

## Tracks (layer width: path | path; a pad name or v marks a point on that pad's centre or on a via)
3.3V
  Top 0.254: U5.17 24.13,71.12 C10.1 24.13,71.37
3.3V1
  Top 0.254: U14.17 130.05,71.12 C27.1 130.05,71.37
3.3V2
  Top 0.254: U23.17 24.13,151.13 C41.1 24.13,151.38
3.3V3
  Top 0.254: U32.17 130.05,151.13 C55.1 130.05,151.38
5V
  Top 0.254: U5.4 35.44,65.92 36.07,66.55 C7.1
  Top 0.406: C2.1 14.35,71.69 U1.4 17.21,71.69 17.53,71.37 17.53,69.34 16.51,68.33 | D1.A 16.78,68.06 16.51,68.33 | R15.2 R13.2 22.35,61.89 22.35,63.75 21.76,64.35 21.34,64.35 | 21.34,64.35 21.34,68.58 21.72,68.96 C9.A 24.09,69.17 U5.20 28.62,69.17 29.59,68.2 | 16.51,68.33 16,67.82 16,64.35 | X1.VBUS 31.83,70.43 29.59,68.2 | U5.4 31.87,65.92 29.59,68.2 | 21.34,64.35 S3.6 16,64.35 | S3.3 16,64.35
5V1
  Top 0.254: U14.4 141.36,65.92 141.99,66.55 C28.1
  Top 0.406: C17.1 120.27,71.69 U12.4 123.13,71.69 123.44,71.37 123.44,69.34 122.43,68.33 | D3.A 122.69,68.06 122.43,68.33 | R41.2 R40.2 128.27,61.89 128.27,63.75 127.67,64.35 127.25,64.35 | 127.25,64.35 127.25,68.58 127.64,68.96 C22.A 130,69.17 U14.20 134.53,69.17 135.51,68.2 | 122.43,68.33 121.92,67.82 121.92,64.35 | X2.VBUS 137.74,70.43 135.51,68.2 | U14.4 137.78,65.92 135.51,68.2 | 127.25,64.35 S6.6 121.92,64.35 | S6.3 121.92,64.35
5V2
  Top 0.254: U23.4 35.44,145.93 36.07,146.56 C42.1
  Top 0.406: C31.1 14.35,151.7 U21.4 17.21,151.7 17.53,151.38 17.53,149.35 16.51,148.34 | D9.A 16.78,148.07 16.51,148.34 | R65.2 R64.2 22.35,141.9 22.35,143.76 21.76,144.36 21.34,144.36 | 21.34,144.36 21.34,148.59 21.72,148.97 C36.A 24.09,149.18 U23.20 28.62,149.18 29.59,148.21 | 16.51,148.34 16,147.83 16,144.36 | X3.VBUS 31.83,150.44 29.59,148.21 | U23.4 31.87,145.93 29.59,148.21 | 21.34,144.36 S10.6 16,144.36 | S10.3 16,144.36
5V3
  Top 0.254: U32.4 141.36,145.93 141.99,146.56 C56.1
  Top 0.406: C45.1 120.27,151.7 U30.4 123.13,151.7 123.44,151.38 123.44,149.35 122.43,148.34 | D13.A 122.69,148.07 122.43,148.34 | R89.2 R88.2 128.27,141.9 128.27,143.76 127.67,144.36 127.25,144.36 | 127.25,144.36 127.25,148.59 127.64,148.97 C50.A 130,149.18 U32.20 134.53,149.18 135.51,148.21 | 122.43,148.34 121.92,147.83 121.92,144.36 | X4.VBUS 137.74,150.44 135.51,148.21 | U32.4 137.78,145.93 135.51,148.21 | 127.25,144.36 S14.6 121.92,144.36 | S14.3 121.92,144.36
A0  (via drill 0.51)
  Top 0.254: U2.23 33.28,54.36 v35.05,54.36 | v38.86,54.36 39.24,53.98 39.24,45.47 arc90 42.93,41.78 45.59,41.78 arc90 46.23,42.42 46.23,44.15 U4.2
  Bottom 0.254: v35.05,54.36 v38.86,54.36
A1  (via drill 0.51)
  Top 0.254: R14.1 65.18,60.72 U6.E 64.01,60.34 64.01,50.04 arc-90 63.37,49.4 61.34,49.4 arc40 56.13,46.99 53.09,43.94 arc-44 47.75,41.78 46.86,41.78 46.35,41.27 42.93,41.27 arc-90 38.73,45.47 38.73,52.96 37.97,53.72 37.97,54.99 v38.61,55.63 | U2.24 34.04,55.12 34.54,55.63 v36.32,55.63
  Bottom 0.254: v36.32,55.63 v38.61,55.63
A2
  Top 0.254: R22.1 C13.2 C12.2 arc90 88.73,56.78 88.01,56.78 | U2.25 31.76,56.9 32.51,57.66 32.89,57.66 33.96,58.73 37.29,58.73 37.85,58.17 37.85,56.77 37.47,56.39 37.47,53.47 38.23,52.7 38.23,45.34 arc90 42.8,40.77 46.74,40.77 47.12,41.15 47.75,41.15 arc47 53.85,43.81 56.77,46.74 arc-42 61.34,48.77 65.79,48.77 arc-50 72.01,45.85 74.42,43.43 arc45 79.88,41.15 85.98,41.15 arc90 88.27,43.43 88.27,53.59 88.01,53.85 88.01,56.78 | D4.C 88.01,56.78
A3  (via drill 0.51)
  Top 0.254: U2.26 30.96,55.34 29.59,53.98 v29.59,49.78 | v23.24,46.61 23.11,46.61 18.03,41.53 10.16,41.53 9.4,40.77 9.4,40.01 10.16,39.24 10.16,14.73 15.75,9.14 34.29,9.14 37.59,12.45 37.59,14.69 U3.1
  Bottom 0.254: v29.59,49.78 26.42,46.61 v23.24,46.61 | 41.31,17.88 U3.1
A4  (via drill 0.51)
  Top 0.254: U2.27 30.16,57.59 30.86,58.29 32.51,58.29 33.53,59.31 37.47,59.31 38.61,60.45 38.61,67.18 v37.97,67.82 | v50.16,79.63 JP3.3
  Bottom 0.254: v37.97,67.82 37.97,72.26 41.4,75.69 46.23,75.69 v50.16,79.63
A5  (via drill 0.51)
  Top 0.254: U2.28 29.36,57.55 30.61,58.8 32.26,58.8 33.27,59.82 37.21,59.82 37.72,60.33 37.72,65.79 v37.47,66.04 | v52.7,79.63 52.7,81.15 52.83,81.28 | JP3.4 52.83,81.28 | 52.83,81.28
  Bottom 0.254: v37.47,66.04 36.96,66.55 36.96,72.14 41.15,76.33 45.34,76.33 49.66,80.64 51.69,80.64 v52.7,79.63
A6
  Top 0.254: R46.1 C24.2 C23.2 arc90 194.65,56.78 193.93,56.78 | U11.25 137.67,56.9 138.43,57.66 138.81,57.66 139.88,58.73 143.21,58.73 143.76,58.17 143.76,56.77 143.38,56.39 143.38,53.47 144.15,52.7 144.15,45.34 arc90 148.72,40.77 152.65,40.77 153.03,41.15 153.67,41.15 arc47 159.77,43.81 162.69,46.74 arc-42 167.26,48.77 171.7,48.77 arc-50 177.93,45.85 180.34,43.43 arc45 185.8,41.15 191.9,41.15 arc90 194.18,43.43 194.18,53.59 193.93,53.85 193.93,56.78 | D6.C 193.93,56.78
A7  (via drill 0.51)
  Top 0.254: U11.26 136.87,55.34 135.51,53.98 v135.51,49.78 | v129.16,46.61 129.03,46.61 123.95,41.53 116.08,41.53 115.32,40.77 115.32,40.01 116.08,39.24 116.08,14.73 121.67,9.14 140.21,9.14 143.51,12.45 143.51,14.69 U13.1
  Bottom 0.254: v135.51,49.78 132.33,46.61 v129.16,46.61 | 147.22,17.88 U13.1
A8  (via drill 0.51)
  Top 0.254: U11.27 136.07,57.59 136.78,58.29 138.43,58.29 139.45,59.31 143.38,59.31 144.53,60.45 144.53,67.18 v143.89,67.82 | v156.08,79.63 JP6.3
  Bottom 0.254: v143.89,67.82 143.89,72.26 147.32,75.69 152.15,75.69 v156.08,79.63
A9  (via drill 0.51)
  Top 0.254: U11.28 135.27,57.55 136.53,58.8 138.18,58.8 139.19,59.82 143.13,59.82 143.64,60.33 143.64,65.79 v143.38,66.04 | v158.62,79.63 158.62,81.15 158.75,81.28 | JP6.4 158.75,81.28 | 158.75,81.28
  Bottom 0.254: v143.38,66.04 142.88,66.55 142.88,72.14 147.07,76.33 151.26,76.33 155.57,80.64 157.61,80.64 v158.62,79.63
A10  (via drill 0.51)
  Top 0.254: U11.23 139.2,54.36 v140.97,54.36 | v144.78,54.36 145.16,53.98 145.16,45.47 arc90 148.84,41.78 151.51,41.78 arc90 152.15,42.42 152.15,44.15 U10.2
  Bottom 0.254: v140.97,54.36 v144.78,54.36
A11  (via drill 0.51)
  Top 0.254: R33.1 171.1,60.72 U18.E 169.93,60.34 169.93,50.04 arc-90 169.29,49.4 167.26,49.4 arc40 162.05,46.99 159,43.94 arc-44 153.67,41.78 152.78,41.78 152.27,41.27 148.84,41.27 arc-90 144.65,45.47 144.65,52.96 143.89,53.72 143.89,54.99 v144.53,55.63 | U11.24 139.96,55.12 140.46,55.63 v142.24,55.63
  Bottom 0.254: v142.24,55.63 v144.53,55.63
A12
  Top 0.254: R70.1 C38.2 C37.2 arc90 88.73,136.79 88.01,136.79 | U20.25 31.76,136.91 32.51,137.67 32.89,137.67 33.96,138.74 37.29,138.74 37.85,138.18 37.85,136.78 37.47,136.4 37.47,133.48 38.23,132.72 38.23,125.35 arc90 42.8,120.78 46.74,120.78 47.12,121.16 47.75,121.16 arc47 53.85,123.83 56.77,126.75 arc-42 61.34,128.78 65.79,128.78 arc-50 72.01,125.86 74.42,123.44 arc45 79.88,121.16 85.98,121.16 arc90 88.27,123.44 88.27,133.6 88.01,133.86 88.01,136.79 | D10.C 88.01,136.79
A13  (via drill 0.51)
  Top 0.254: U20.26 30.96,135.35 29.59,133.99 v29.59,129.79 | v23.24,126.62 23.11,126.62 18.03,121.54 10.16,121.54 9.4,120.78 9.4,120.02 10.16,119.25 10.16,94.74 15.75,89.15 34.29,89.15 37.59,92.46 37.59,94.7 U22.1
  Bottom 0.254: v29.59,129.79 26.42,126.62 v23.24,126.62 | 41.31,97.89 U22.1
A14  (via drill 0.51)
  Top 0.254: U20.27 30.16,137.6 30.86,138.3 32.51,138.3 33.53,139.32 37.47,139.32 38.61,140.46 38.61,147.19 v37.97,147.83 | v50.16,159.64 JP9.3
  Bottom 0.254: v37.97,147.83 37.97,152.27 41.4,155.7 46.23,155.7 v50.16,159.64
A15  (via drill 0.51)
  Top 0.254: U20.28 29.36,137.56 30.61,138.81 32.26,138.81 33.27,139.83 37.21,139.83 37.72,140.34 37.72,145.8 v37.47,146.05 | v52.7,159.64 52.7,161.16 52.83,161.29 | JP9.4 52.83,161.29 | 52.83,161.29
  Bottom 0.254: v37.47,146.05 36.96,146.56 36.96,152.15 41.15,156.34 45.34,156.34 49.66,160.66 51.69,160.66 v52.7,159.64
A16  (via drill 0.51)
  Top 0.254: U20.23 33.28,134.37 v35.05,134.37 | v38.86,134.37 39.24,133.99 39.24,125.48 arc90 42.93,121.79 45.59,121.79 arc90 46.23,122.43 46.23,124.16 U19.2
  Bottom 0.254: v35.05,134.37 v38.86,134.37
A17  (via drill 0.51)
  Top 0.254: R57.1 65.18,140.73 U27.E 64.01,140.35 64.01,130.05 arc-90 63.37,129.41 61.34,129.41 arc40 56.13,127 53.09,123.95 arc-44 47.75,121.79 46.86,121.79 46.35,121.28 42.93,121.28 arc-90 38.73,125.48 38.73,132.97 37.97,133.73 37.97,135 v38.61,135.64 | U20.24 34.04,135.13 34.54,135.64 v36.32,135.64
  Bottom 0.254: v36.32,135.64 v38.61,135.64
A18
  Top 0.254: R94.1 C52.2 C51.2 arc90 194.65,136.79 193.93,136.79 | U29.25 137.67,136.91 138.43,137.67 138.81,137.67 139.88,138.74 143.21,138.74 143.76,138.18 143.76,136.78 143.38,136.4 143.38,133.48 144.15,132.72 144.15,125.35 arc90 148.72,120.78 152.65,120.78 153.03,121.16 153.67,121.16 arc47 159.77,123.83 162.69,126.75 arc-42 167.26,128.78 171.7,128.78 arc-50 177.93,125.86 180.34,123.44 arc45 185.8,121.16 191.9,121.16 arc90 194.18,123.44 194.18,133.6 193.93,133.86 193.93,136.79 | D14.C 193.93,136.79
A19  (via drill 0.51)
  Top 0.254: U29.26 136.87,135.35 135.51,133.99 v135.51,129.79 | v129.16,126.62 129.03,126.62 123.95,121.54 116.08,121.54 115.32,120.78 115.32,120.02 116.08,119.25 116.08,94.74 121.67,89.15 140.21,89.15 143.51,92.46 143.51,94.7 U31.1
  Bottom 0.254: v135.51,129.79 132.33,126.62 v129.16,126.62 | 147.22,97.89 U31.1
A20  (via drill 0.51)
  Top 0.254: U29.27 136.07,137.6 136.78,138.3 138.43,138.3 139.45,139.32 143.38,139.32 144.53,140.46 144.53,147.19 v143.89,147.83 | v156.08,159.64 JP12.3
  Bottom 0.254: v143.89,147.83 143.89,152.27 147.32,155.7 152.15,155.7 v156.08,159.64
A21  (via drill 0.51)
  Top 0.254: U29.28 135.27,137.56 136.53,138.81 138.18,138.81 139.19,139.83 143.13,139.83 143.64,140.34 143.64,145.8 v143.38,146.05 | v158.62,159.64 158.62,161.16 158.75,161.29 | JP12.4 158.75,161.29 | 158.75,161.29
  Bottom 0.254: v143.38,146.05 142.88,146.56 142.88,152.15 147.07,156.34 151.26,156.34 155.57,160.66 157.61,160.66 v158.62,159.64
A22  (via drill 0.51)
  Top 0.254: U29.23 139.2,134.37 v140.97,134.37 | v144.78,134.37 145.16,133.99 145.16,125.48 arc90 148.84,121.79 151.51,121.79 arc90 152.15,122.43 152.15,124.16 U28.2
  Bottom 0.254: v140.97,134.37 v144.78,134.37
A23  (via drill 0.51)
  Top 0.254: R81.1 171.1,140.73 U36.E 169.93,140.35 169.93,130.05 arc-90 169.29,129.41 167.26,129.41 arc40 162.05,127 159,123.95 arc-44 153.67,121.79 152.78,121.79 152.27,121.28 148.84,121.28 arc-90 144.65,125.48 144.65,132.97 143.89,133.73 143.89,135 v144.53,135.64 | U29.24 139.96,135.13 140.46,135.64 v142.24,135.64
  Bottom 0.254: v142.24,135.64 v144.53,135.64
BLUE
  Top 0.254: U$5.CB 62.91,32.9 R17.2
BLUE1
  Top 0.254: U$1.CB 168.83,32.9 R30.2
BLUE2
  Top 0.254: U$2.CB 62.91,112.91 R54.2
BLUE3
  Top 0.254: U$3.CB 168.83,112.91 R78.2
D1  (via drill 0.51)
  Top 0.254: U11.15 136.87,47.15 137.29,46.74 v137.29,43.94 | v124.33,46.35 124.59,46.1 v124.59,43.43 123.32,42.16 115.95,42.16 114.81,41.02 114.81,39.75 115.57,38.99 115.57,14.35 121.28,8.64 156.59,8.64 v163.7,15.75 | v169.93,38.73 169.16,38.73 168.91,38.48 168.91,37.08 U$1.AB
  Bottom 0.254: v124.59,43.43 124.97,43.81 134.24,43.81 135.13,42.93 136.27,42.93 v137.29,43.94 | J2.4 118.36,50.04 122.05,46.35 v124.33,46.35 | v163.7,15.75 169.93,21.97 v169.93,38.73
D2  (via drill 0.51)
  Top 0.254: U2.32 26.16,55.63 26.42,55.37 27.18,55.37 28.32,54.23 28.32,50.16 v28.19,50.04 | R3.2 13.21,20.57 v12.83,20.19 | v10.41,40.39 17.78,40.39 21.72,44.32 24.38,44.32 24.89,44.83 24.89,47.24 v24.38,47.75
  Bottom 0.254: v28.19,50.04 27.43,49.28 26.29,49.28 24.77,47.75 v24.38,47.75 | v12.83,20.19 11.94,20.19 9.14,22.99 9.14,39.12 v10.41,40.39
D3  (via drill 0.51)
  Top 0.254: U2.1 25.78,55.12 26.42,54.48 v26.8,54.48 | v102.11,19.56 102.11,14.48 100.08,12.45 R6.2
  Bottom 0.254: v26.8,54.48 27.94,54.48 38.86,65.41 38.86,72.26 41.53,74.93 74.93,74.93 80.52,80.52 100.84,80.52 102.11,79.25 v102.11,19.56
D4  (via drill 0.51)
  Top 0.254: U2.2 25.69,54.32 25.91,54.1 25.91,53.85 27.69,52.07 27.69,51.05 25.4,48.77 25.4,44.45 24.64,43.69 22.1,43.69 20.95,42.55 v20.95,41.27 | v21.34,34.54 21.59,34.29 21.59,32.27 | LED1.A 21.59,32.27 | 21.59,32.27 21.59,32.26
  Bottom 0.254: v21.34,34.54 22.1,35.31 22.1,40.13 v20.95,41.27
D5  (via drill 0.51)
  Top 0.254: U2.9 26.16,44.44 24.38,42.67 22.61,42.67 v22.23,42.29 | v23.88,32.89 24.51,32.26 26.67,32.26 26.67,32.27 LED2.A
  Bottom 0.254: v23.88,32.89 22.61,34.16 22.61,41.91 v22.23,42.29
D6
  Top 0.254: U2.10 26.96,44.48 24.64,42.16 23.62,42.16 21.97,40.51 21.97,35.43 23.62,33.78 30.24,33.78 LED3.A
D7
  Top 0.254: U2.11 27.76,44.52 24.89,41.66 23.88,41.66 22.61,40.39 22.61,35.69 23.37,34.92 34.16,34.92 36.82,32.27 | 36.83,32.26 36.82,32.27 | 36.82,32.27 LED4.A
D8
  Top 0.254: U2.12 28.56,44.56 25.15,41.15 24.13,41.15 23.24,40.26 23.24,35.94 23.62,35.56 38.62,35.56 LED5.A
D9  (via drill 0.51)
  Top 0.254: v23.62,12.45 25.91,10.16 33.78,10.16 36.58,12.95 36.58,17.53 39.62,20.57 62.61,20.57 63.63,21.59 63.63,26.42 61.09,28.96 61.09,34.16 62.48,35.56 63.5,35.56 64.01,36.07 U$5.AR | U2.13 29.36,44.18 v29.59,43.94
  Bottom 0.254: v23.62,12.45 16.64,12.45 8.64,20.45 8.64,40.01 13.08,44.45 29.08,44.45 v29.59,43.94
  pour Top: 104.73,48.96 104.73,48.56 106.24,48.56 106.24,48.96 105.76,48.96 105.76,50.68 105.4,50.68 105.37,50.67 105.31,50.63 105.25,50.61 105.22,50.59 105.19,50.58 105.15,50.57 105.12,50.56 105.08,50.54 105.04,50.53 105.01,50.52 104.97,50.51 104.92,50.51 104.84,50.49 104.84,50.18 105.27,50.18 105.27,48.96
D10  (via drill 0.51)
  Top 0.254: v22.61,11.43 24.38,9.65 34.04,9.65 37.08,12.7 37.08,17.27 39.75,19.94 62.87,19.94 64.39,21.46 64.39,26.42 66.93,28.96 66.93,34.04 65.11,35.86 U$5.AG | U2.14 30.16,47.06 30.48,46.74 v30.48,46.1
  Bottom 0.254: v22.61,11.43 16.89,11.43 8.13,20.19 8.13,40.26 12.83,44.96 29.46,44.96 30.48,45.97 v30.48,46.1 30.48,46.23
D11  (via drill 0.51)
  Top 0.254: U2.15 30.96,47.15 31.37,46.74 v31.37,43.94 | v18.41,46.35 18.67,46.1 v18.67,43.43 17.4,42.16 10.03,42.16 8.89,41.02 8.89,39.75 9.65,38.99 9.65,14.35 15.37,8.64 50.67,8.64 v57.78,15.75 | v64.01,38.73 63.25,38.73 62.99,38.48 62.99,37.08 U$5.AB
  Bottom 0.254: v18.67,43.43 19.05,43.81 28.32,43.81 29.21,42.93 30.35,42.93 v31.37,43.94 | J1.4 12.45,50.04 16.13,46.35 v18.41,46.35 | v57.78,15.75 64.01,21.97 v64.01,38.73
D12  (via drill 0.51)
  Top 0.254: 10.67,42.67 9.65,42.67 8.38,41.4 8.38,39.5 9.14,38.73 9.14,14.1 15.11,8.13 81.41,8.13 83.19,9.91 85.34,9.91 arc90 89.03,13.59 89.03,20.45 90.04,21.46 90.04,32 89.28,32.77 89.28,33.27 | 10.67,42.67 16,42.67 v16.38,43.05 | v32.38,45.34 31.88,45.85 31.88,46.99 31.76,47.11 U2.16 | J1.1 10.67,51.31 10.67,42.67 | 89.28,33.27 89.28,35.22 R23.2 | S5.A2 89.25,33.24 89.28,33.27
  Bottom 0.254: v16.38,43.05 16.89,42.55 19.81,42.55 20.57,43.31 28.07,43.31 28.96,42.42 31.24,42.42 32.38,43.56 v32.38,45.34
D13  (via drill 0.51)
  Top 0.254: U2.17 33.02,49.3 v33.02,48.01 34.8,48.01 R5.2
  Bottom 0.254: v33.02,48.01 29.46,48.01 26.92,45.47 15.88,45.47 12.57,48.77 10.67,48.77 J1.3
D14  (via drill 0.51)
  Top 0.254: U11.17 138.94,49.3 v138.94,48.01 140.72,48.01 R37.2
  Bottom 0.254: v138.94,48.01 135.38,48.01 132.84,45.47 121.79,45.47 118.49,48.77 116.59,48.77 J2.3
D15  (via drill 0.51)
  Top 0.254: U11.9 132.07,44.44 130.3,42.67 128.52,42.67 v128.14,42.29 | v129.79,32.89 130.43,32.26 132.59,32.26 132.59,32.27 LED11.A
  Bottom 0.254: v129.79,32.89 128.52,34.16 128.52,41.91 v128.14,42.29
D16  (via drill 0.51)
  Top 0.254: v129.54,12.45 131.83,10.16 139.7,10.16 142.49,12.95 142.49,17.53 145.54,20.57 168.53,20.57 169.54,21.59 169.54,26.42 167,28.96 167,34.16 168.4,35.56 169.42,35.56 169.93,36.07 U$1.AR | U11.13 135.27,44.18 v135.51,43.94
  Bottom 0.254: v129.54,12.45 122.56,12.45 114.55,20.45 114.55,40.01 119,44.45 135,44.45 v135.51,43.94
  pour Top: 210.65,48.96 210.65,48.56 212.16,48.56 212.16,48.96 211.68,48.96 211.68,50.68 211.32,50.68 211.29,50.67 211.23,50.63 211.17,50.61 211.14,50.59 211.11,50.58 211.07,50.57 211.04,50.56 211,50.54 210.96,50.53 210.93,50.52 210.89,50.51 210.84,50.51 210.76,50.49 210.76,50.18 211.19,50.18 211.19,48.96
D17
  Top 0.254: U11.10 132.87,44.48 130.56,42.16 129.54,42.16 127.89,40.51 127.89,35.43 129.54,33.78 136.16,33.78 LED12.A
D18  (via drill 0.51)
  Top 0.254: v128.52,11.43 130.3,9.65 139.95,9.65 143,12.7 143,17.27 145.67,19.94 168.78,19.94 170.31,21.46 170.31,26.42 172.85,28.96 172.85,34.04 171.03,35.86 U$1.AG | U11.14 136.07,47.06 136.4,46.74 v136.4,46.1
  Bottom 0.254: v128.52,11.43 122.81,11.43 114.05,20.19 114.05,40.26 118.75,44.96 135.38,44.96 136.4,45.97 v136.4,46.1 136.4,46.23
D19  (via drill 0.51)
  Top 0.254: U11.32 132.08,55.63 132.33,55.37 133.1,55.37 134.24,54.23 134.24,50.16 v134.11,50.04 | R38.2 119.13,20.57 v118.75,20.19 | v116.33,40.39 123.7,40.39 127.64,44.32 130.3,44.32 130.81,44.83 130.81,47.24 v130.3,47.75
  Bottom 0.254: v134.11,50.04 133.35,49.28 132.21,49.28 130.68,47.75 v130.3,47.75 | v118.75,20.19 117.86,20.19 115.06,22.99 115.06,39.12 v116.33,40.39
D20  (via drill 0.51)
  Top 0.254: U11.1 131.7,55.12 132.33,54.48 v132.72,54.48 | v208.03,19.56 208.03,14.48 205.99,12.45 R47.2
  Bottom 0.254: v132.72,54.48 133.86,54.48 144.78,65.41 144.78,72.26 147.45,74.93 180.85,74.93 186.44,80.52 206.76,80.52 208.03,79.25 v208.03,19.56
D21  (via drill 0.51)
  Top 0.254: U11.2 131.6,54.32 131.83,54.1 131.83,53.85 133.6,52.07 133.6,51.05 131.32,48.77 131.32,44.45 130.56,43.69 128.02,43.69 126.87,42.55 v126.87,41.27 | v127.25,34.54 127.51,34.29 127.51,32.27 | LED10.A 127.51,32.27 | 127.51,32.27 127.51,32.26
  Bottom 0.254: v127.25,34.54 128.02,35.31 128.02,40.13 v126.87,41.27
D22
  Top 0.254: U11.12 134.47,44.56 131.06,41.15 130.05,41.15 129.16,40.26 129.16,35.94 129.54,35.56 144.54,35.56 LED14.A
D23
  Top 0.254: U11.11 133.67,44.52 130.81,41.66 129.79,41.66 128.52,40.39 128.52,35.69 129.29,34.92 140.08,34.92 142.74,32.27 | 142.75,32.26 142.74,32.27 | 142.74,32.27 LED13.A
D24  (via drill 0.51)
  Top 0.254: 116.59,42.67 115.57,42.67 114.3,41.4 114.3,39.5 115.06,38.73 115.06,14.1 121.03,8.13 187.32,8.13 189.1,9.91 191.26,9.91 arc90 194.94,13.59 194.94,20.45 195.96,21.46 195.96,32 195.2,32.77 195.2,33.27 | 116.59,42.67 121.92,42.67 v122.3,43.05 | v138.3,45.34 137.79,45.85 137.79,46.99 137.67,47.11 U11.16 | J2.1 116.59,51.31 116.59,42.67 | 195.2,33.27 195.2,35.22 R39.2 | S8.A2 195.16,33.24 195.2,33.27
  Bottom 0.254: v122.3,43.05 122.81,42.55 125.73,42.55 126.49,43.31 133.99,43.31 134.87,42.42 137.16,42.42 138.3,43.56 v138.3,45.34
D25  (via drill 0.51)
  Top 0.254: U20.15 30.96,127.16 31.37,126.75 v31.37,123.95 | v18.41,126.36 18.67,126.11 v18.67,123.44 17.4,122.17 10.03,122.17 8.89,121.03 8.89,119.76 9.65,119 9.65,94.36 15.37,88.65 50.67,88.65 v57.78,95.76 | v64.01,118.75 63.25,118.75 62.99,118.49 62.99,117.09 U$2.AB
  Bottom 0.254: v18.67,123.44 19.05,123.83 28.32,123.83 29.21,122.94 30.35,122.94 v31.37,123.95 | J3.4 12.45,130.05 16.13,126.36 v18.41,126.36 | v57.78,95.76 64.01,101.98 v64.01,118.75
D26  (via drill 0.51)
  Top 0.254: U20.17 33.02,129.31 v33.02,128.02 34.8,128.02 R61.2
  Bottom 0.254: v33.02,128.02 29.46,128.02 26.92,125.48 15.88,125.48 12.57,128.78 10.67,128.78 J3.3
D27  (via drill 0.51)
  Top 0.254: U20.9 26.16,124.45 24.38,122.68 22.61,122.68 v22.23,122.3 | v23.88,112.9 24.51,112.27 26.67,112.27 26.67,112.28 LED18.A
  Bottom 0.254: v23.88,112.9 22.61,114.17 22.61,121.92 v22.23,122.3
D28  (via drill 0.51)
  Top 0.254: v23.62,92.46 25.91,90.17 33.78,90.17 36.58,92.96 36.58,97.54 39.62,100.58 62.61,100.58 63.63,101.6 63.63,106.43 61.09,108.97 61.09,114.17 62.48,115.57 63.5,115.57 64.01,116.08 U$2.AR | U20.13 29.36,124.19 v29.59,123.95
  Bottom 0.254: v23.62,92.46 16.64,92.46 8.64,100.46 8.64,120.02 13.08,124.46 29.08,124.46 v29.59,123.95
  pour Top: 104.73,128.97 104.73,128.57 106.24,128.57 106.24,128.97 105.76,128.97 105.76,130.69 105.4,130.69 105.37,130.68 105.31,130.64 105.25,130.62 105.22,130.6 105.19,130.59 105.15,130.58 105.12,130.57 105.08,130.55 105.04,130.54 105.01,130.53 104.97,130.52 104.92,130.52 104.84,130.5 104.84,130.19 105.27,130.19 105.27,128.97
D29
  Top 0.254: U20.10 26.96,124.49 24.64,122.17 23.62,122.17 21.97,120.52 21.97,115.44 23.62,113.79 30.24,113.79 LED19.A
D30  (via drill 0.51)
  Top 0.254: v22.61,91.44 24.38,89.66 34.04,89.66 37.08,92.71 37.08,97.28 39.75,99.95 62.87,99.95 64.39,101.47 64.39,106.43 66.93,108.97 66.93,114.05 65.11,115.87 U$2.AG | U20.14 30.16,127.07 30.48,126.75 v30.48,126.11
  Bottom 0.254: v22.61,91.44 16.89,91.44 8.13,100.2 8.13,120.27 12.83,124.97 29.46,124.97 30.48,125.98 v30.48,126.11 30.48,126.24
D31  (via drill 0.51)
  Top 0.254: U20.32 26.16,135.64 26.42,135.38 27.18,135.38 28.32,134.24 28.32,130.18 v28.19,130.05 | R62.2 13.21,100.58 v12.83,100.2 | v10.41,120.4 17.78,120.4 21.72,124.33 24.38,124.33 24.89,124.84 24.89,127.25 v24.38,127.76
  Bottom 0.254: v28.19,130.05 27.43,129.29 26.29,129.29 24.77,127.76 v24.38,127.76 | v12.83,100.2 11.94,100.2 9.14,103 9.14,119.13 v10.41,120.4
D32  (via drill 0.51)
  Top 0.254: U20.1 25.78,135.13 26.42,134.49 v26.8,134.49 | v102.11,99.57 102.11,94.49 100.08,92.46 R71.2
  Bottom 0.254: v26.8,134.49 27.94,134.49 38.86,145.41 38.86,152.27 41.53,154.94 74.93,154.94 80.52,160.53 100.84,160.53 102.11,159.26 v102.11,99.57
D33  (via drill 0.51)
  Top 0.254: U20.2 25.69,134.33 25.91,134.11 25.91,133.86 27.69,132.08 27.69,131.06 25.4,128.78 25.4,124.46 24.64,123.7 22.1,123.7 20.95,122.56 v20.95,121.28 | v21.34,114.55 21.59,114.3 21.59,112.28 | LED17.A 21.59,112.28 | 21.59,112.28 21.59,112.27
  Bottom 0.254: v21.34,114.55 22.1,115.32 22.1,120.14 v20.95,121.28
D34
  Top 0.254: U20.12 28.56,124.57 25.15,121.16 24.13,121.16 23.24,120.27 23.24,115.95 23.62,115.57 38.62,115.57 LED21.A
D35
  Top 0.254: U20.11 27.76,124.53 24.89,121.67 23.88,121.67 22.61,120.4 22.61,115.7 23.37,114.94 34.16,114.94 36.82,112.28 | 36.83,112.27 36.82,112.28 | 36.82,112.28 LED20.A
D36  (via drill 0.51)